# EAGLE board Adafruit-FONA-800-GSM-Breakout1 (EAGLE 7.5.0)
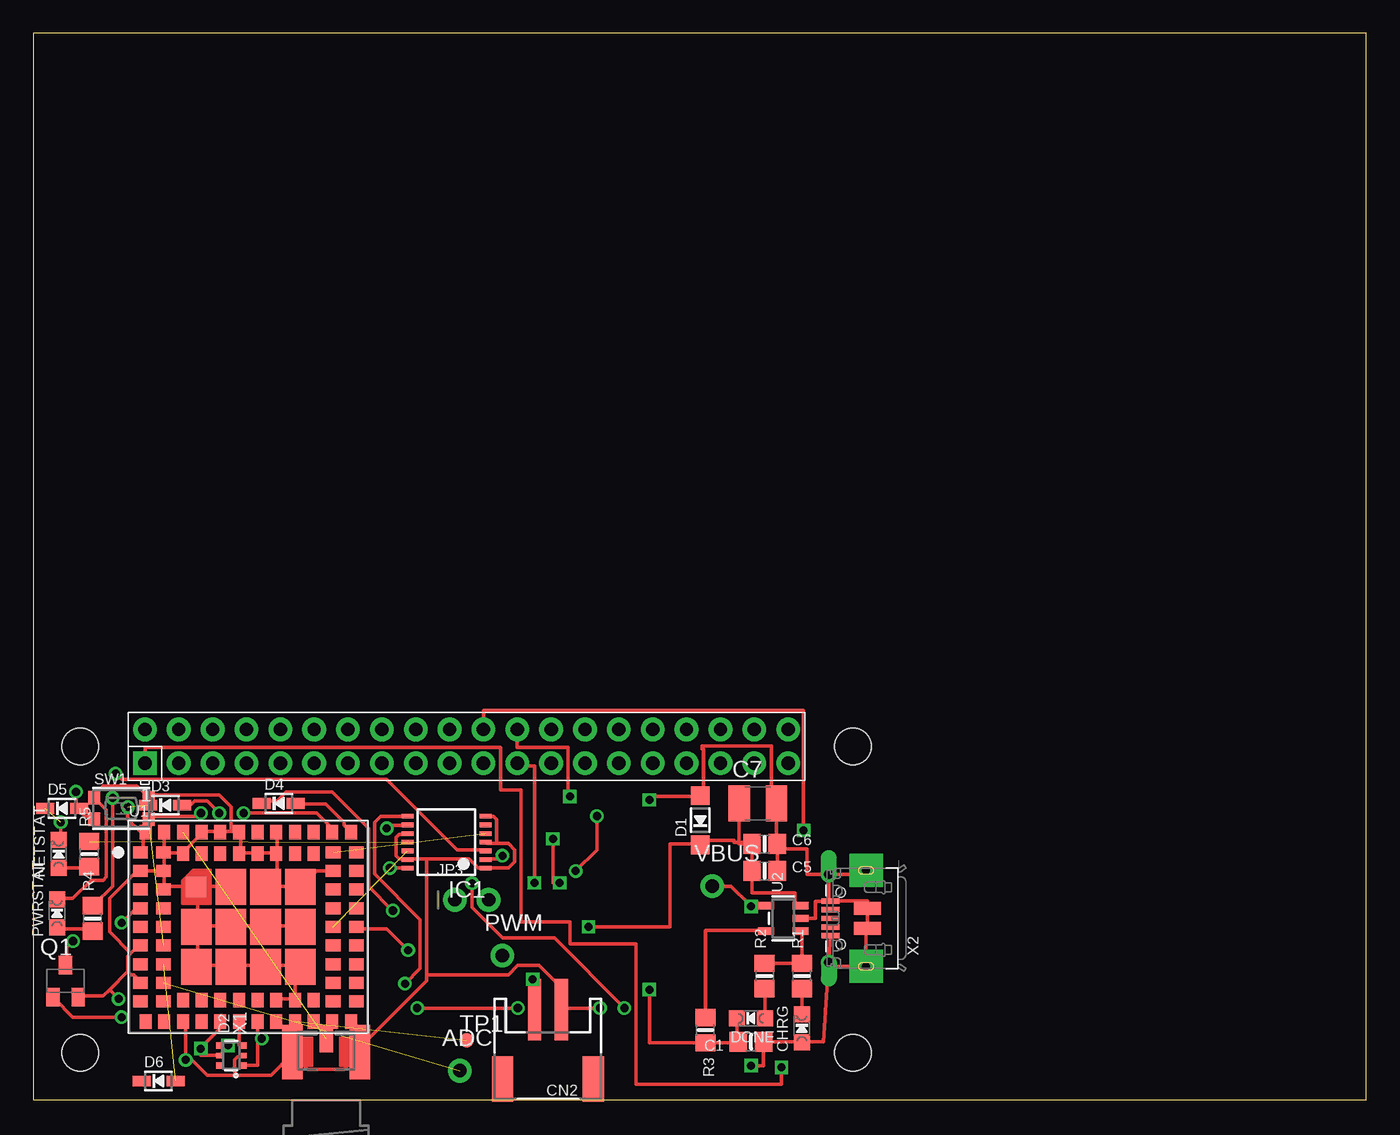
[diagram p0: board, top side]
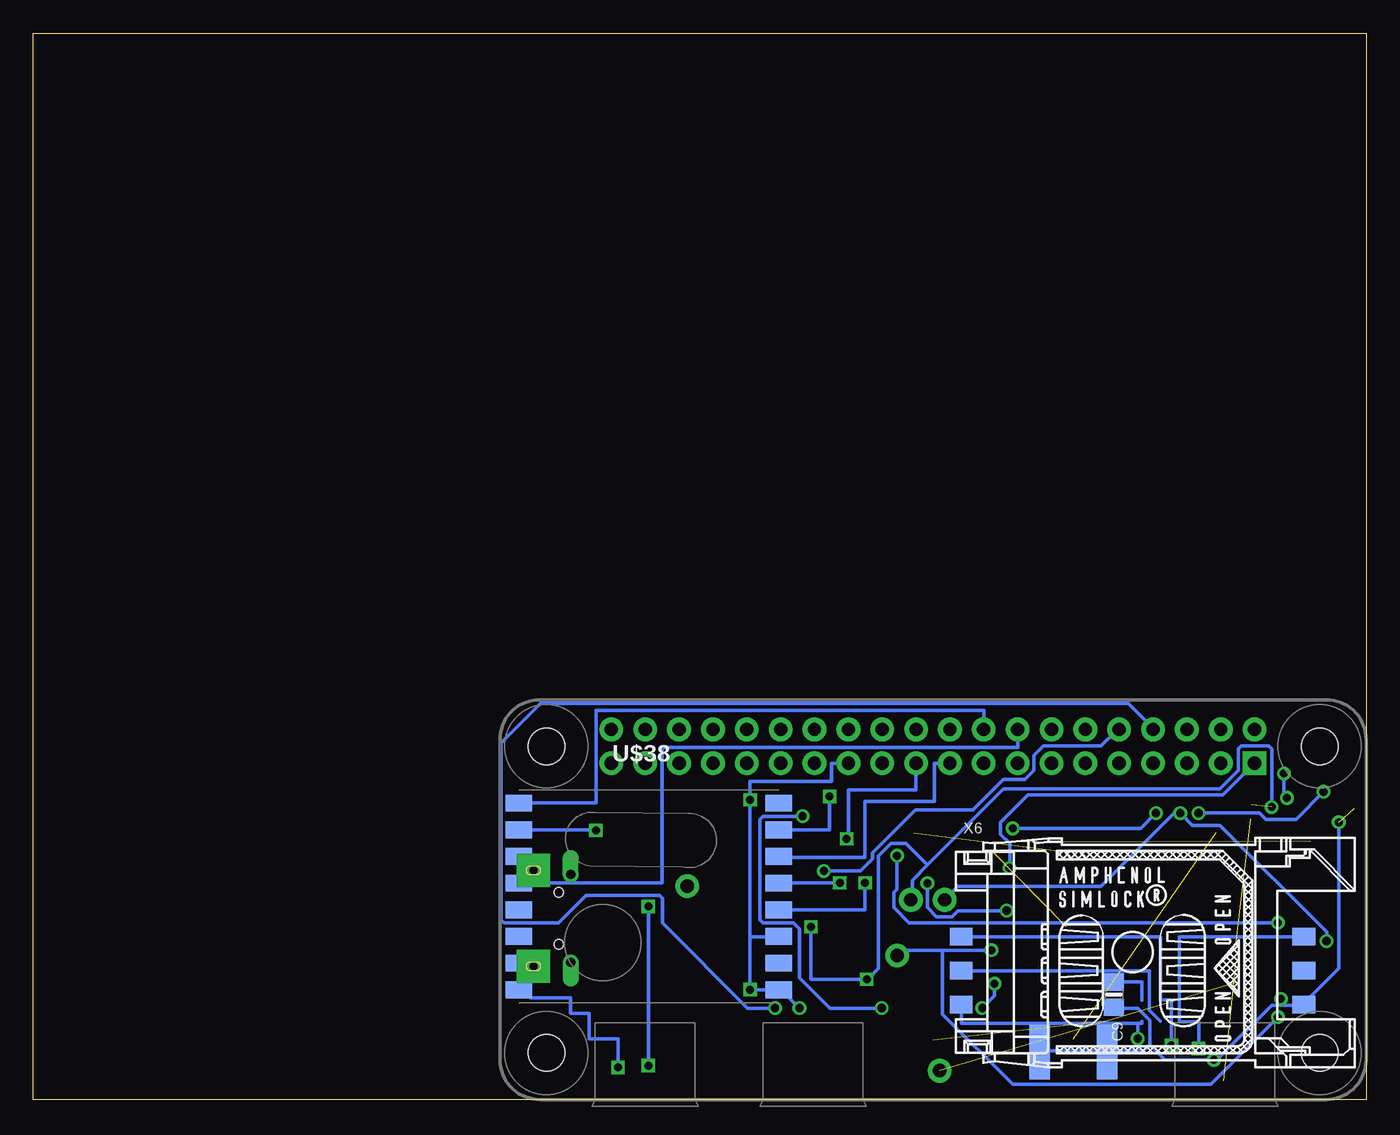
[diagram p1: board, bottom side, seen from below]

Size 100 x 80 mm. Coordinates in mm from the lower left corner, seen from the top.
Outline: 0,0 100,0 100,80 0,80 0,0
Copper layers (1*16): Top 0.035mm / dielectric 1.5mm / Bottom 0.035mm
Design rules "default": minimum track width 10mil, minimum drill 24mil, track to track 8mil, track to pad 8mil, pad to pad 8mil, via to via 8mil, smd to smd 8mil, copper to edge 40mil, drill to drill 8mil, minimum pad ring 10mil, minimum via ring 8mil, stop-mask expansion 4mil, vias tented up to drill 0mil, thermal gap 10mil

## Footprints (pad centres in the part's own frame; a part is rotated, then mirrored left to right if it is on the bottom)
1X01-CLEANBIG = drill 1.016 pad 1.778: 1 0,0
0805-NO = smd 1.3 x 1.5: 1 -0.95,0; 2 0.95,0
C1210 = smd 1.6 x 2.7: 1 -1.4,0; 2 1.4,0
CHIPLED_0805_NOOUTLINE = smd 1.2 x 1.2: A 0,-1.05; C 0,1.05
JSTPH2 = smd 1 x 4.6: 1 -1,-3.7; 2 1,-3.7 | smd 1.6 x 3.4: NC1 -3.4,1.5; NC2 3.4,1.5
SOD-123 = smd 1.4 x 1.4: A 1.85,0; C -1.85,0
SOT363 = smd 0.5 x 0.5: 1 -0.75,-0.9; 3 0.75,-0.9; 4 0.75,0.9; 6 -0.75,0.9 | smd 0.4 x 0.5: 2 0,-0.9; 5 0,0.9
SOD-323 = smd 1.35 x 0.8: A 1.27,0; C -1.27,0
TSSOP14 = smd 0.35 x 0.9: 1 -1.95,-2.925; 2 -1.3,-2.925; 3 -0.65,-2.925; 4 0,-2.925; 5 0.65,-2.925; 6 1.3,-2.925; 7 1.95,-2.925; 8 1.95,2.925; 9 1.3,2.925; 10 0.65,2.925; 11 0,2.925; 12 -0.65,2.925; 13 -1.3,2.925; 14 -1.95,2.925
1X02_ROUND = drill 1 pad 1.778: 1 -1.27,0; 2 1.27,0
SC59-BEC = smd 1 x 1.4: B -0.95,-1.2; C 0,1.2; E 0.95,-1.2
BTN_KMR2_4.6X2.8 = smd 0.9 x 1: A 2.05,0.8; A' -2.05,0.8; B 2.05,-0.8; B' -2.05,-0.8
TP11R = smd 1.1 x 1.1: TP 0,0
SIM800L = smd 1.1 x 0.9: 1 -8.1,5.6; 2 -8.1,4.2; 3 -8.1,2.8; 4 -8.1,1.4; 5 -8.1,0; 6 -8.1,-1.4; 7 -8.1,-2.8; 8 -8.1,-4.2; 9 -8.1,-5.6; 22 8.1,-5.6; 23 8.1,-4.2; 24 8.1,-2.8; 25 8.1,-1.4; 26 8.1,0; 27 8.1,1.4; 28 8.1,2.8; 29 8.1,4.2; 30 8.1,5.6; 43 -6.36,5.6; 44 -6.36,4.2; 45 -6.36,2.8; 46 -6.36,1.4; 47 -6.36,0; 48 -6.36,-1.4; 49 -6.36,-2.8; 50 -6.36,-4.2; 51 -6.36,-5.6; 60 6.36,-5.6; 61 6.36,-4.2; 62 6.36,-2.8; 63 6.36,-1.4; 64 6.36,0; 65 6.36,1.4; 66 6.36,2.8; 67 6.36,4.2; 68 6.36,5.6 | smd 0.9 x 1.1: 10 -7.7,-7.1; 11 -6.3,-7.1; 12 -4.9,-7.1; 13 -3.5,-7.1; 14 -2.1,-7.1; 15 -0.7,-7.1; 16 0.7,-7.1; 17 2.1,-7.1; 18 3.5,-7.1; 19 4.9,-7.1; 20 6.3,-7.1; 21 7.7,-7.1; 31 7.7,7.1; 32 6.3,7.1; 33 4.9,7.1; 34 3.5,7.1; 35 2.1,7.1; 36 0.7,7.1; 37 -0.7,7.1; 38 -2.1,7.1; 39 -3.5,7.1; 40 -4.9,7.1; 41 -6.3,7.1; 42 -7.7,7.1; 52 -4.9,-5.5; 53 -3.5,-5.5; 54 -2.1,-5.5; 55 -0.7,-5.5; 56 0.7,-5.5; 57 2.1,-5.5; 58 3.5,-5.5; 59 4.9,-5.5; 69 4.9,5.5; 70 3.5,5.5; 71 2.1,5.5; 72 0.7,5.5; 73 -0.7,5.5; 74 -2.1,5.5; 75 -3.5,5.5; 76 -4.9,5.5 | smd 1.5 x 1.5: 77 -3.9,3 | smd 2.3 x 2.7: 78 -3.9,0; 79 -3.9,-3; 80 -1.3,-3; 81 1.3,-3; 82 3.9,-3; 83 3.9,0; 84 3.9,3; 85 1.3,3; 86 -1.3,3; 87 -1.3,0; 88 1.3,0
SOT23-5 = smd 0.55 x 1.2: 1 -0.95,-1.3; 2 0,-1.3; 3 0.95,-1.3; 4 0.95,1.3; 5 -0.95,1.3
RASPBERRYPI_BASTELSTUBE_V13_RASPI_BOARD_B+_FULL = drill 1 pad 1.778 square: 1 8.37,25.23 | drill 1 pad 1.778: 2 8.37,27.77; 3 10.91,25.23; 4 10.91,27.77; 5 13.45,25.23; 6 13.45,27.77; 7 15.99,25.23; 8 15.99,27.77; 9 18.53,25.23; 10 18.53,27.77; 11 21.07,25.23; 12 21.07,27.77; 13 23.61,25.23; 14 23.61,27.77; 15 26.15,25.23; 16 26.15,27.77; 17 28.69,25.23; 18 28.69,27.77; 19 31.23,25.23; 20 31.23,27.77; 21 33.77,25.23; 22 33.77,27.77; 23 36.31,25.23; 24 36.31,27.77; 25 38.85,25.23; 26 38.85,27.77; 27 41.39,25.23; 28 41.39,27.77; 29 43.93,25.23; 30 43.93,27.77; 31 46.47,25.23; 32 46.47,27.77; 33 49.01,25.23; 34 49.01,27.77; 35 51.55,25.23; 36 51.55,27.77; 37 54.09,25.23; 38 54.09,27.77; 39 56.63,25.23; 40 56.63,27.77 | hole 2.75: 3.5,3.5; 3.5,26.5; 61.5,3.5; 61.5,26.5
RFM69W-MINPADS = smd 2 x 1.27: 3.3V -11.5,-7; ANA 8,-5; DIO0 -11.5,5; DIO1 -11.5,3; DIO2 -11.5,1; DIO3 -11.5,-1; DIO4 -11.5,-3; DIO5 -11.5,-5; GND 8,-7; GND2 8,-3; MISO 8,1; MOSI 8,3; NC 8,7; NSS 8,5; RESET -11.5,7; SCK 8,-1
SMA_EDGELAUNCH_UFL = smd 4.064 x 1.524: GND@1 2.032,-2.54; GND@2 2.032,2.54 | smd 4.064 x 1.524 bottom: GND@3 2.032,2.54; GND@4 2.032,-2.54 | smd 2.032 x 1.016: P 3.048,0
4UCONN_20329 = smd 1 x 2: BASE@1 -0.75,-2; BASE@2 0.75,-2 | smd 0.4 x 1.35: D+ 0,0.775; D- -0.65,0.775; GND 1.3,0.775; ID 0.65,0.775; VBUS -1.3,0.775 | drill 0.7 offset: SPRT@1 -3.3,0.9; SPRT@2 3.3,0.9 | drill 0.6 pad 2.5 square: SPRT@3 -3.6,-1.9; SPRT@4 3.6,-1.9 | hole 0.7: -1.95,0; 1.95,0
C707_10M006_512_2 = smd 1.7 x 1.3: C1 -12.85,-3.915; C2 -12.85,-1.375; C3 -12.85,1.165; C5 12.85,-3.915; C6 12.85,-1.375; C7 12.85,1.165

## Placement (x,y rotation side)
ADC  [1X01-CLEANBIG]  32,2.16 0 top
C1  10µF  [0805-NO]  53.85,4.32 180 top
C5  10pF  [0805-NO]  54.86,17.14 0 top
C6  33pF  [0805-NO]  54.86,19.18 0 top
C7  100uF  [C1210]  54.36,22.23 0 top
C9  10uF  [0805-NO]  18.92,7.87 270 bottom
CHRG  ORANGE  [CHIPLED_0805_NOOUTLINE]  57.66,5.33 0 top
CN2  JSTPH  [JSTPH2]  38.61,3.05 180 top
D1  MMSZ5231BT1G  [SOD-123]  50.04,20.95 90 top
D2  SMF05C  [SOT363]  14.86,3.3 90 top
D3  1N4148  [SOD-323]  9.91,22.1 0 top
D4  1N4148  [SOD-323]  18.41,22.23 0 top
D5  1N4148  [SOD-323]  2.16,21.84 0 top
D6  1N4148  [SOD-323]  9.4,1.4 0 top
DONE  GREEN  [CHIPLED_0805_NOOUTLINE]  53.85,6.1 90 top
IC1  74VHCT125PW  [TSSOP14]  30.99,19.3 90 top
JP3  BUZZ  [1X02_ROUND]  32.89,14.99 0 top
NETSTAT  BLUE  [CHIPLED_0805_NOOUTLINE]  1.91,18.41 0 top
PWM  [1X01-CLEANBIG]  35.18,10.79 0 top
PWRSTAT  GREEN  [CHIPLED_0805_NOOUTLINE]  1.78,13.97 0 top
Q1  DTC143ZUAT106  [SC59-BEC]  2.41,8.89 0 top
R1  470  [0805-NO]  57.66,9.27 90 top
R2  1K  [0805-NO]  54.86,9.27 90 top
R3  2K  [0805-NO]  50.42,5.21 270 top
R4  1K  [0805-NO]  4.45,13.59 90 top
R5  1K  [0805-NO]  4.19,18.41 90 top
SW1  KMR2  [BTN_KMR2_4.6X2.8]  6.6,21.84 0 top
TP1  TPTP11R  [TP11R]  32.51,4.45 0 top
U1  SIM800H/L  [SIM800L]  16.13,12.95 0 top
U2  MCP73831T-2ACI/OT  [SOT23-5]  56.26,13.59 90 top
U$10  RPI-ZERO  [RASPBERRYPI_BASTELSTUBE_V13_RASPI_BOARD_B+_FULL]  0,0 0 top
U$38  RFM69  [RFM69W-MINPADS]  52.07,15.24 0 bottom
VBUS  [1X01-CLEANBIG]  50.93,16 0 top
X1  [SMA_EDGELAUNCH_UFL]  21.97,1.52 90 top
X2  MicroB  [4UCONN_20329]  60.58,13.59 90 top
X6  SIM_LOCKAMPHENOL  [C707_10M006_512_2]  17.53,11.05 0 bottom

## Library data of the parts
ADC PWM VBUS = adafruit
C1 C5 C6 C9 CHRG CN2 D1-D6 DONE JP3 NETSTAT PWRSTAT R1-R5 SW1 U1 U2 X1 X2 = microbuilder
C7 = rcl
IC1 = 74xx-us
Q1 = transistor
TP1 = testpad
U$10 = RPI-Zero
U$38 = RFM69
X6 = microbuilder; OC_FARNELL: unknown; OC_NEWARK: unknown

## Nets
1.8V: D2.1 U1.16 X6.C1
2.8V: TP1.TP U1.18
+5V: C1.1 CHRG.A U2.4 VBUS.1 X2.VBUS
ADC: ADC.1 U1.50
GND: C1.2 C5.2 C6.2 C7.2 C9.2 CN2.1 D1.A D2.2 D5.C DONE.C IC1.1 IC1.4 IC1.7 IC1.10 IC1.13 NETSTAT.C PWRSTAT.C Q1.E R3.2 SW1.A SW1.A' U1.2 U1.6 U1.8 U1.12 U1.35 U1.37 U1.38 U1.39 U1.41 U1.43 U1.44 U1.45 U1.57 U1.58 U1.67 U1.71 U1.72 U1.73 U1.76 U1.77 U1.78 U1.79 U1.80 U1.81 U1.82 U1.83 U1.84 U1.85 U1.86 U1.87 U1.88 U2.2 U$10.25 U$38.GND U$38.GND2 X1.GND@1 X1.GND@2 X1.GND@3 X1.GND@4 X2.BASE@1 X2.BASE@2 X2.GND X2.SPRT@1 X2.SPRT@2 X2.SPRT@3 X2.SPRT@4 X6.C5
GSM_ANT: U1.40 X1.P
HP+: U1.17
N$1: CHRG.C R1.1
N$2: R1.2 R2.2 U2.1
N$4: PWRSTAT.A R4.1
N$5: R3.1 U2.5
N$6: DONE.A R2.1
N$9: NETSTAT.A R5.1
N$16: D3.A JP3.1 Q1.C
NETSTAT: IC1.12 U1.64
NETSTAT_5V: IC1.11 R5.2
PWM: PWM.1 Q1.B U1.26
PWRKEY: D5.A SW1.B SW1.B' U1.48
PWRSTAT: IC1.2 U1.4
PWRSTAT_5V: IC1.3 R4.2
R_DIO0: U$10.22 U$38.DIO0
R_DIO2: U$10.16 U$38.DIO2
R_MISO: U$10.21 U$38.MISO
R_MOSI: U$10.19 U$38.MOSI
R_NSS: U$10.24 U$38.NSS
R_RESET: U$10.18 U$38.RESET
R_SCK: U$10.23 U$38.SCK
RESET: D6.A U1.49
RESET_5V: D6.C
RI: IC1.5 U1.68
RI_5V: IC1.6
RXD_5V: D4.C U$10.8
SIMCLK: D2.4 U1.55 X6.C3
SIMDATA: D2.5 U1.14 X6.C7
SIMRST: D2.3 U1.15 X6.C2
TXD_5V: IC1.8 U$10.10
UART_RXD: D4.A U1.31
UART_TXD: IC1.9 U1.32
VBAT: C5.1 C6.1 C7.1 CN2.2 D1.C D3.C JP3.2 U1.1 U1.42 U2.3
VBUS: U1.7
VCCIO: IC1.14 U$10.1 U$38.3.3V
VRTC: C9.1 U1.56

## Tracks (layer width: path | path; a pad name or v marks a point on that pad's centre or on a via)
1.8V  (via drill 0.61)
  Top 0.254: D2.1 16.83,2.55 16.83,4.57 | 16.83,4.57 U1.16 | v17.14,4.57 16.83,4.57
  Bottom 0.254: X6.C1 30.35,7.13 30.35,5.71 17.14,5.71 | 17.14,5.71 16.83,5.71 U1.16 | 17.14,5.71 v17.14,4.57
2.8V  (1 unrouted)
+5V  (via drill 0.6)
  Top 0.254: CHRG.A 57.66,4.32 | 57.66,4.32 C1.1 54.8,2.54 v53.85,2.54 | 57.66,4.32 59.3,4.32 X2.VBUS | U2.4 53.85,14.54 v53.85,14.48 53.72,14.63 52.35,16 VBUS.1
  Bottom 0.254: v53.85,14.48 v53.85,2.54
ADC  (1 unrouted)
GND  (via drill 0.6, 0.61)  (1 unrouted)
  Top 0.254: U2.2 58.67,13.59 58.67,14.86 59.8,14.86 X2.GND | X2.GND 59.68,14.89 X2.SPRT@2 | X2.SPRT@2 62.48,16.89 X2.SPRT@4 | X2.GND 62.58,14.89 X2.BASE@2 X2.BASE@1 62.48,12.84 X2.SPRT@3 59.68,9.99 X2.SPRT@1 | v46.23,8.24 46.23,4.26 R3.2 52.9,4.26 C1.2 52.81,4.34 52.81,5.94 DONE.C | X2.SPRT@2 58.04,16.89 58.04,18.8 55.81,18.8 C6.2 | C6.2 C5.2 | C6.2 55.76,19.18 C7.2 55.37,22.23 55.37,26.54 50.16,26.54 50.16,26.29 50.29,26.29 50.29,23.37 50.04,23.37 D1.A 50.04,22.73 46.23,22.73 v46.23,22.48 | PWRSTAT.C 1.83,15.09 2.97,15.09 4.34,16.46 5.26,16.46 5.49,16.69 5.49,21.72 4.57,22.63 SW1.A' 4.57,22.86 5.26,23.55 7.77,23.55 8.46,22.86 SW1.A 8.69,22.86 13.95,22.86 14.86,21.95 14.86,20.12 | 12.34,10.06 14.63,10.06 U1.80 14.86,10.06 17.37,10.06 U1.81 17.6,10.06 19.89,10.06 U1.82 19.89,9.83 19.66,9.6 19.66,7.54 U1.58 19.43,7.54 18.29,7.54 U1.57 | 12.34,13.03 14.63,13.03 U1.87 14.86,13.03 17.37,13.03 U1.88 17.6,13.03 19.89,13.03 U1.83 | 7.09,9.6 7.32,9.37 7.54,9.37 8,8.91 U1.8 | 7.09,9.6 7.09,10.74 7.32,10.97 | 7.32,10.97 8,11.66 U1.6 | 7.09,9.6 5.71,8.23 | 5.71,8.23 5.26,7.77 3.43,7.77 Q1.E | U1.67 22.4,17.14 21.26,17.14 20.12,16 U1.84 19.89,16 18.29,16 | 18.29,16 17.6,16 U1.85 18.29,16 | 14.86,20.12 14.17,20.12 U1.38 13.95,20.12 12.8,20.12 U1.39 12.57,19.89 11.2,18.52 | 14.86,20.12 15.32,20.12 U1.37 15.54,19.89 15.54,18.52 | 15.54,18.52 16.69,18.52 U1.72 16.92,18.52 18.06,18.52 U1.71 | U1.35 18.29,19.89 18.29,18.52 U1.71 | 15.54,18.52 U1.73 | U1.77 12.34,16 14.63,16 U1.86 | U1.41 9.83,19.89 9.83,18.75 U1.43 9.83,18.52 | 9.83,18.52 11.2,18.52 | 9.83,16 9.83,17.14 U1.44 | 9.83,16 9.83,15.77 U1.45 9.83,16
  Top 0.254: U1.44 9.6,17.14 8.23,17.14 U1.2 8,17.37 5.71,15.09 5.71,12.57 7.32,10.97 | 9.83,18.52 9.83,17.37 U1.44 | 9.83,16 12.12,16 U1.77 | 11.2,18.52 U1.76 | 18.29,16 18.29,18.29 U1.71 | 12.34,13.03 12.34,15.77 U1.77 | 12.34,13.03 U1.78 12.34,12.8 12.34,10.06 | 12.34,10.06 U1.79 | v2.06,20.8 2.06,19.66 NETSTAT.C | v6.4,7.54 5.71,8.23 | v42.52,6.86 39.78,6.86 CN2.1 39.55,6.86 39.55,8.46 37.95,10.06 36.35,10.06 35.66,9.37 29.49,9.37 | IC1.10 27.89,19.89 27.43,19.89 27.2,19.66 27.2,18.29 27.43,18.06 27.89,18.06 IC1.13 28.12,18.06 29.49,18.06 | 34.75,19.2 34.06,19.2 IC1.4 | 34.75,19.2 35.66,19.2 36.12,18.75 36.12,17.83 35.66,17.37 34.06,17.37 IC1.1 33.83,17.37 33.38,17.37 32.69,18.06 29.49,18.06 | 34.75,19.2 34.75,21.03 34.52,21.26 34.06,21.26 IC1.7 | 15.32,1.83 15.09,2.06 15.09,2.97 15.32,3.2 15.54,3.2 D2.2 | 15.32,1.83 17.83,1.83 19.43,3.43 | 11.66,3.2 13.03,1.83 15.32,1.83 | 11.66,3.2 11.43,3.43 11.43,5.71 U1.12 | 19.43,3.43 20.57,2.29 23.32,2.29 24.46,3.43 X1.GND@1 24.69,3.66 24.69,4.12 29.49,8.91 29.49,9.37 | 19.43,3.43 X1.GND@2 | 29.49,9.37 29.49,18.06 | 11.66,3.2 v11.43,2.97
  Bottom 0.254: U$10.25 40.13,25.23 40.13,23.88 46.23,23.88 v46.23,22.48 46.23,12.19 | 46.23,12.19 44.07,12.19 U$38.GND2 | 46.23,12.19 v46.23,8.24 U$38.GND 43.89,8.23 v42.52,6.86 | 16.23,4.12 16.23,5.94 17.14,6.86 18.75,6.86 C9.2 | 16.23,4.12 16.69,3.66 19.43,3.66 | 19.43,3.66 24.46,3.66 X1.GND@1 | 19.43,3.66 X1.GND@2 | v2.06,20.8 2.06,9.83 4.57,7.32 X6.C5 4.8,7.09 6.4,7.09 | 16.23,4.12 15.09,2.97 v11.43,2.97 11.2,2.97 7.09,7.09 6.4,7.09 | 6.4,7.09 v6.4,7.54
GSM_ANT  (1 unrouted)
N$1
  Top 0.254: R1.1 CHRG.C
N$2
  Top 0.254: U2.1 57.66,12.64 R1.2 R2.2
N$4
  Top 0.254: PWRSTAT.A 1.83,12.8 4.34,12.8 R4.1
N$5
  Top 0.254: R3.1 50.42,12.7 54.96,12.7 U2.5
N$6
  Top 0.254: R2.1 54.9,8.32 DONE.A
N$9
  Top 0.254: NETSTAT.A 2.06,17.37 4.12,17.37 R5.1
N$16  (via drill 0.61)
  Top 0.254: v13.95,21.49 13.03,22.4 12.12,22.4 11.89,22.17 11.2,22.17 D3.A | v2.97,11.89 2.52,11.43 2.52,10.29 Q1.C
  Bottom 0.254: JP3.1 31.55,15.09 30.63,16 19.89,16 14.4,21.49 v13.95,21.49 13.03,20.57 10.97,20.57 2.97,12.57 v2.97,11.89
NETSTAT  (1 unrouted)
NETSTAT_5V  (1 unrouted)
PWM  (via drill 0.61)
  Top 0.254: v28.12,11.2 26.52,12.8 24.23,12.8 U1.26 | v6.63,6.17 2.97,6.17 1.6,7.54 Q1.B
  Bottom 0.254: 31.77,11.2 34.75,11.2 34.98,10.97 PWM.1 | 31.77,11.2 v28.12,11.2 | v6.63,6.17 11.66,1.14 26.52,1.14 31.77,6.4 31.77,11.2
PWRKEY  (via drill 0.61)  (1 unrouted)
  Top 0.254: SW1.B' 4.34,21.26 3.89,21.26 3.43,21.72 D5.A 3.43,21.95 3.2,22.17 v3.2,23.09 | v12.57,21.49 12.34,21.26 8.69,21.26 SW1.B
  Bottom 0.254: v12.57,21.49 8,21.49 7.54,21.03 5.26,21.03 v3.2,23.09
PWRSTAT  (via drill 0.61)
  Top 0.254: v35.2,18.29 34.98,18.06 34.06,18.06 IC1.2 | v6.63,13.26 7.54,14.17 8,14.17 U1.4
  Bottom 0.254: v35.2,18.29 35.2,15.77 35.43,15.54 35.43,14.4 34.29,13.26 v6.63,13.26
PWRSTAT_5V  (via drill 0.61)
  Top 0.254: v6.17,24.46 6.63,24 26.52,24 31.77,18.75 33.83,18.75 IC1.3 | v5.94,22.63 5.94,16 4.57,14.63 R4.2
  Bottom 0.254: v6.17,24.46 6.17,22.86 v5.94,22.63
R_DIO0  (via drill 0.6)
  Top 0.254: 57.78,20.07 v57.78,20.19 57.78,29.21 33.77,29.21 U$10.22
  Bottom 0.254: U$38.DIO0 57.78,20.24 v57.78,20.19
R_DIO2
  Bottom 0.254: U$38.DIO2 52.83,16.24 52.83,26.42 26.15,26.42 U$10.16
R_MISO  (via drill 0.6)
  Top 0.254: v39.5,16.26 38.99,16.26 v38.99,19.56
  Bottom 0.254: U$38.MISO 39.5,16.24 v39.5,16.26 | v38.99,19.56 38.86,19.56 38.86,23.24 33.77,23.24 U$10.21
R_MOSI
  Bottom 0.254: U$10.19 32.38,25.23 32.38,22.35 37.59,22.35 37.59,18.16 44.07,18.16 U$38.MOSI
R_NSS  (via drill 0.6)
  Top 0.254: v40.26,22.73 40.13,22.73 40.13,26.42 36.31,26.42 U$10.24
  Bottom 0.254: U$38.NSS 40.26,20.24 v40.26,22.73
R_RESET
  Bottom 0.254: U$38.RESET 57.78,22.24 57.78,29.21 28.69,29.21 U$10.18
R_SCK  (via drill 0.6)
  Top 0.254: v37.59,16.26 37.59,25.02 36.31,25.02 U$10.23
  Bottom 0.254: U$38.SCK 37.59,14.24 v37.59,16.26
RESET  (1 unrouted)
RI  (1 unrouted)
RXD_5V  (via drill 0.61)
  Top 0.254: v26.98,14.17 25.15,16 25.15,20.34 22.4,23.09 18.97,23.09 18.29,22.4 17.14,22.4 D4.C | v32.92,16.23 32.92,14.4 35.2,12.12 39.09,12.12 v44.35,6.86
  Bottom 0.254: v26.98,14.17 30.63,14.17 31.09,13.72 32.23,13.72 32.92,14.4 v32.92,16.23 | v44.35,6.86 46.41,6.86 52.81,13.26 52.81,15.09 53.03,15.32 58.52,15.32 60.58,13.26 64.69,13.26 64.92,13.49 64.92,26.75 61.95,29.72 17.83,29.72 16,27.89 U$10.8
SIMCLK  (via drill 0.6)  (1 unrouted)
  Top 0.254: D2.4 v14.61,4.05 v14.61,4.06
  Bottom 0.254: X6.C3 15.43,12.21 15.43,7.49 | v14.61,4.06 14.61,7.49 15.43,7.49 | 15.43,7.49 U1.55
SIMDATA  (via drill 0.6)
  Top 0.254: D2.5 12.57,3.3 v12.57,3.81 12.57,3.89 13.95,5.26 13.95,5.71 U1.14
  Bottom 0.254: X6.C7 14.03,12.21 U1.14 12.57,5.84 v12.57,3.81
SIMRST  (1 unrouted)
  Top 0.254: D2.3 15.43,4.05 U1.15
  Bottom 0.254: X6.C2 16.26,9.67 16.26,6.68 U1.15
TXD_5V  (via drill 0.61)
  Top 0.254: v27.89,8.69 29.03,9.83 29.03,13.49 25.6,16.92 25.6,20.8 26.06,21.26 27.89,21.26 IC1.8 | v36.35,6.86 v28.8,6.86 | v42.29,21.26 42.29,18.75 v40.69,17.14
  Bottom 0.254: v27.89,8.69 27.89,7.77 v28.8,6.86 | v36.35,6.86 40.23,6.86 42.52,9.14 42.52,12.8 42.98,13.26 45.26,13.26 45.49,13.49 45.49,21.03 45.26,21.26 v42.29,21.26 | v40.69,17.14 37.95,17.14 37.03,18.06 37.03,18.52 33.83,21.72 29.49,21.72 27.2,24 25.6,24 24.92,24.69 24.92,25.83 24.23,26.52 19.89,26.52 18.75,27.66 U$10.10
UART_RXD
  Top 0.254: U1.31 23.77,20.12 23.32,20.57 23.32,20.8 21.95,22.17 19.89,22.17 D4.A
UART_TXD  (via drill 0.61)
  Top 0.254: v26.52,20.34 26.75,20.57 27.89,20.57 IC1.9 | v15.77,21.49 21.26,21.49 22.63,20.12 U1.32
  Bottom 0.254: v26.52,20.34 16.92,20.34 v15.77,21.49
VBAT  (via drill 0.6, 0.61)  (1 unrouted)
  Top 0.254: U2.3 57.15,14.54 57.15,15.49 53.91,15.49 C5.1 C6.1 53.21,19.18 | C7.1 52.96,19.18 53.21,19.18 | 53.21,19.18 53.21,19.3 52.58,19.3 52.58,19.43 50.04,19.43 D1.C 50.04,19.18 47.75,19.18 47.75,12.95 v41.66,12.95 | CN2.2 37.47,6.37 v37.47,9.02 | U1.1 8.23,18.75 8.23,19.89 U1.42 8.23,20.12 8,20.12 7.09,21.03 v7.09,21.95
  Bottom 0.254: v41.66,12.95 41.66,9.02 v37.47,9.02 37.26,9.14 36.58,9.83 36.58,18.29 35.66,19.2 34.52,19.2 32.92,17.6 | v7.09,21.95 7.09,26.29 7.32,26.52 9.37,26.52 9.6,26.29 9.6,24.69 10.97,23.32 27.2,23.32 32.92,17.6 | 32.92,17.6 34.06,16.46 34.06,15.09 JP3.2
VCCIO  (via drill 0.6, 0.61)
  Top 0.254: U$10.1 8.38,25.23 8.38,26.42 35.05,26.42 35.05,23.24 36.58,23.24 36.58,13.34 40.26,13.34 40.26,11.68 45.21,11.68 45.21,1.14 56.13,1.14 v56.13,2.41 | v26.75,17.37 27.89,17.37 IC1.14
  Bottom 0.254: v56.13,2.41 56.13,4.57 58.29,4.57 58.29,6.48 59.69,6.48 59.69,7.62 62.74,7.62 62.74,7.87 63.57,7.87 U$38.3.3V | v26.75,17.37 26.75,19.2 27.43,19.89 27.43,20.8 25.38,22.86 10.74,22.86 8.46,25.15 U$10.1
VRTC  (1 unrouted)
  Bottom 0.254: C9.1 16.83,8.82 U1.56